# Altium PCB MP1584 Module PCB.PcbDoc
Units mm, origin at the board's own origin, x right, y up, seen from the top; angles counter-clockwise.
Board outline 22.15 x 16.85 mm, 2 copper layers (Top Layer, Bottom Layer); 14 components, 10 nets, 43 pads, 0 vias.
Unrouted connection lines stored in the file: 24.
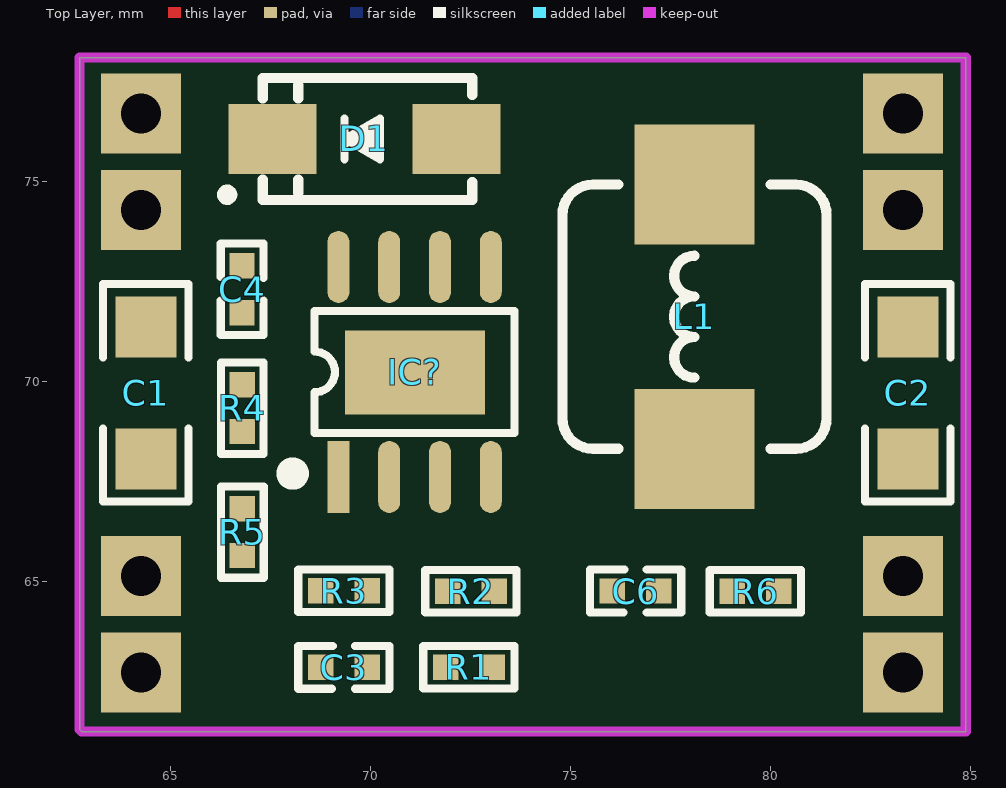
[diagram p0: Top Layer view]
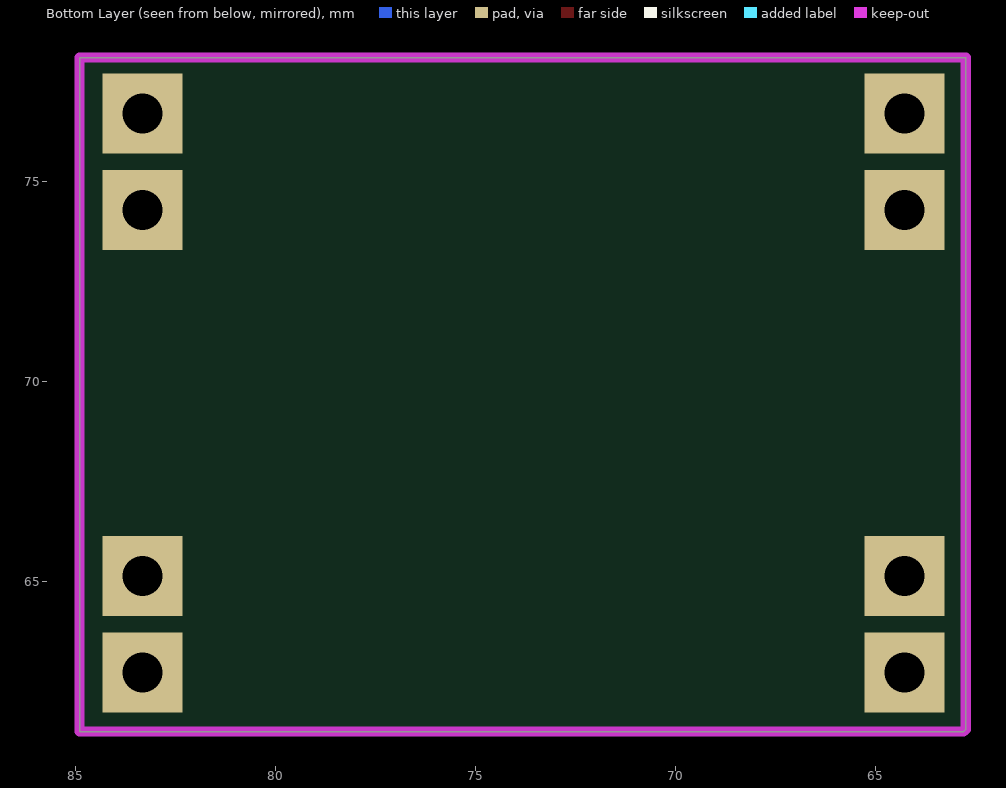
[diagram p1: Bottom Layer view, seen from below]

## Layer stack, top to bottom
Top Solder: solder mask 0.0102, Solder Resist, Dk 3.5
Top Layer: signal copper 0.0356
Dielectric 1: dielectric 0.32, FR-4, Dk 4.8
Bottom Layer: signal copper 0.0356
Bottom Solder: solder mask 0.0102, Solder Resist, Dk 3.5

## Board outline
62.733,61.31 62.786,61.258 84.886,61.258 84.886,78.105 62.738,78.105 62.733,78.1

## Design rules (kind name [scope] priority, off if disabled: settings)
Clearance [All] p1: gap=0.254 ignorepadtopadclearanceinfootprint=FALSE except(0: Arc-Hole Track-Hole SMDPad-Hole THPad-Hole Via-Hole Fill-Hole Poly-Hole Region-Hole Text-Hole)
PolygonConnect [All] p1: connectstyle=Relief reliefconductorwidth=0.254 reliefentries=4 polygonreliefangle="90 Angle" airgapwidth=0.254
RoutingVias [All] p1: holewidth=0.711 width=1.27 viastyle="Through Hole" minholewidth=0.711 minwidth=1.27 maxholewidth=0.711 maxwidth=1.27
SolderMaskExpansion [All] p1: expansion=0.102 istentingtop=FALSE
Width [All] p1: maxlimit=0.254 minlimit=0.254 preferedwidth=0.254
30 further rules are at their usual default settings.

## Components (designator, comment, footprint, x,y, rotation, side; value= is the part's Value field where it differs from the comment)
C1 "10uF/50V" "C 1206" 64.389,69.723 r270 top
C2 "22uF/6.3V" "C 1206" 83.439,69.723 r90 top
C3 "=Value" "C 0402" 69.342,62.865 r180 top
C4 "=Value" "C 0402" 66.798,72.314 r90 top
C6 "=Value" "C 0402" 76.632,64.774 r180 top
D1 "SS34" SMA 69.85,76.073 r180 top
IC? "MP1584" SOP8_N-EP 71.109,70.246 r90 top
L1 "15uF" WHC0630 78.105,71.628 r90 top
R1 "=Value" "R 0402-HP" 72.466,62.861 r0 top
R2 "=Value" "R 0402-HP" 72.517,64.77 r180 top
R3 "=Value" "R 0402-HP" 69.342,64.77 r0 top
R4 "=Value" "R 0402-HP" 66.802,69.342 r90 top
R5 "=Value" "R 0402-HP" 66.798,66.243 r270 top
R6 "=Value" "R 0402-HP" 79.629,64.77 r180 top

## Footprints (in the part's own frame and the unit in brackets; to place one, negate y for a bottom-side part, rotate by r counter-clockwise, add the part's x,y. Pads: shape width x height; smd on the part's side, far side on the other; paste and mask are expansions set on the pad)
"C 0402" [mil] "ï؟½ق¼ï؟½ï؟½ï؟½ï؟½ï؟½ئ¬ï؟½ï؟½ï؟½ï؟½"
  rect 25x25 smd: 1(-23,0.16) 2(23,0.16)
  silkscreen extent -45,-21 45,21, body extent -20,-10 20,10, height 20
"C 1206" [mil] "ï؟½ق¼ï؟½ï؟½ï؟½ï؟½ï؟½ئ¬ï؟½ï؟½ï؟½ï؟½"
  rect 60x60 smd: 1(-65,0) 2(65,0)
  silkscreen extent -107,-42 107,42, body extent -63,-32 63,32, height 48
"R 0402-HP" [mil] "1/16Wï؟½ك¾ï؟½ï؟½ï؟½ï؟½ï؟½ئ¬ï؟½ï؟½ï؟½ï؟½"
  rect 25x25 smd: 1(-23,0.16) 2(23,0.16)
  silkscreen extent -45,-21 45,21, body extent -20,-10 20,10, height 12
SMA [mm] "4.5x2.6*2.2mm£¨³¤؟ي¸ك£¬²»°üہ¨ز‎½إ£©"
  rect 2.2x1.75 smd: 1(-2.3,0) 2(2.3,0)
  silkscreen extent -2.7,-1.52 3.56,1.52, body extent -2.53,-1.3 2.58,1.3, height 2.15
SOP8_N-EP [mm] "5*6*1.8mm£¨³¤؟ي¸ك£©"
  rect 1.8x0.55 smd: 1(-2.625,1.905)
  oval 1.8x0.55 smd: 2(-2.625,0.635) 3(-2.625,-0.635) 4(-2.625,-1.905) 5(2.625,-1.905) 6(2.625,-0.635) 7(2.625,0.635) 8(2.625,1.905)
  rect 2.1x3.5 smd: 9(-0.015,-0.011)
  silkscreen extent -2.69,-2.5 1.52,3.2, body extent -3,-2.5 3,2.5, height 1.9
WHC0630 [mm] "6.6*6.6*3.4mm£¨³¤؟ي¸ك£©"
  rect 3x3 smd: 1(-3.302,0) 2(3.302,0)
  silkscreen extent -3.3,-3.3 3.3,3.3, body extent -3.3,-3.3 3.3,3.3, height 3.2

## Part data
C1 C2 C3 C4 C6: library part C, "Non-polar patch capacitor", BOM名称=无极性贴片电容, 学习资源=www.ooocke.com, 版权归属=源创客
D1: "Schottky diodes", BOM名称=肖特基二极管, 学习资源=www.ooocke.com, 属性=40V/3A, 版权归属=源创客
IC?: "DC step-down chip"
L1: library part L-WHC, "One-piece high current inductor"
R1 R2 R3 R4 R5 R6: library part R, "Chip resistor", BOM名称="Chip resistor", 学习资源=www.ooocke.com, 版权归属=源创客

## Free pads (board coordinates)
  rect 2x2 hole 1: 9(64.262,76.708) 10(64.262,74.295) 11(64.262,65.151) 12(64.262,62.738) 13(83.312,76.708) 14(83.312,74.295) 15(83.312,65.151) 16(83.312,62.738)

## Nets (pads, with @x,y where several pads share a name; then routed paths per layer and width w, separated by ;. In a path a pad name is that pad's centre, name@x,y a point inside that pad or via, vN(x,y) a via of type N, cw(c..) or ccw(c..) an arc to the next point about the centre after c; other vN are vias at no path point)
EN: IC?.2 R5.2 R6.2
GND: C1.2 C2.2 C6.1 D1.1 IC?.5 R2.2 R3.1 R4.1 R6.1
NetC2_1: C2.1 L1.2 R1.1
NetC3_1: C3.1 R3.2
NetC3_2: C3.2 C6.2 IC?.3
NetC4_1: C4.1 IC?.8
NetC4_2: C4.2 D1.2 IC?.1 L1.1
NetIC?_4: IC?.4 R1.2 R2.1
NetIC?_6: IC?.6 R4.2
Vin: C1.1 IC?.7 R5.1
pads on no net: IC?.9

## Keep-outs
Keep-Out Layer:
  lines w0.254: 84.886,78.055 84.886,61.258 62.786,61.258 62.733,61.31 62.733,78.1 62.738,78.105 84.886,78.105